# Altium PCB PowerSupplyPCB - Panel.PcbDoc
Units mm, origin at the board's own origin, x right, y up, seen from the top; angles counter-clockwise.
Board outline 231.52 x 210 mm, 2 copper layers (Top Layer, Bottom Layer); 66 components, 8 nets, 228 pads, 0 vias.
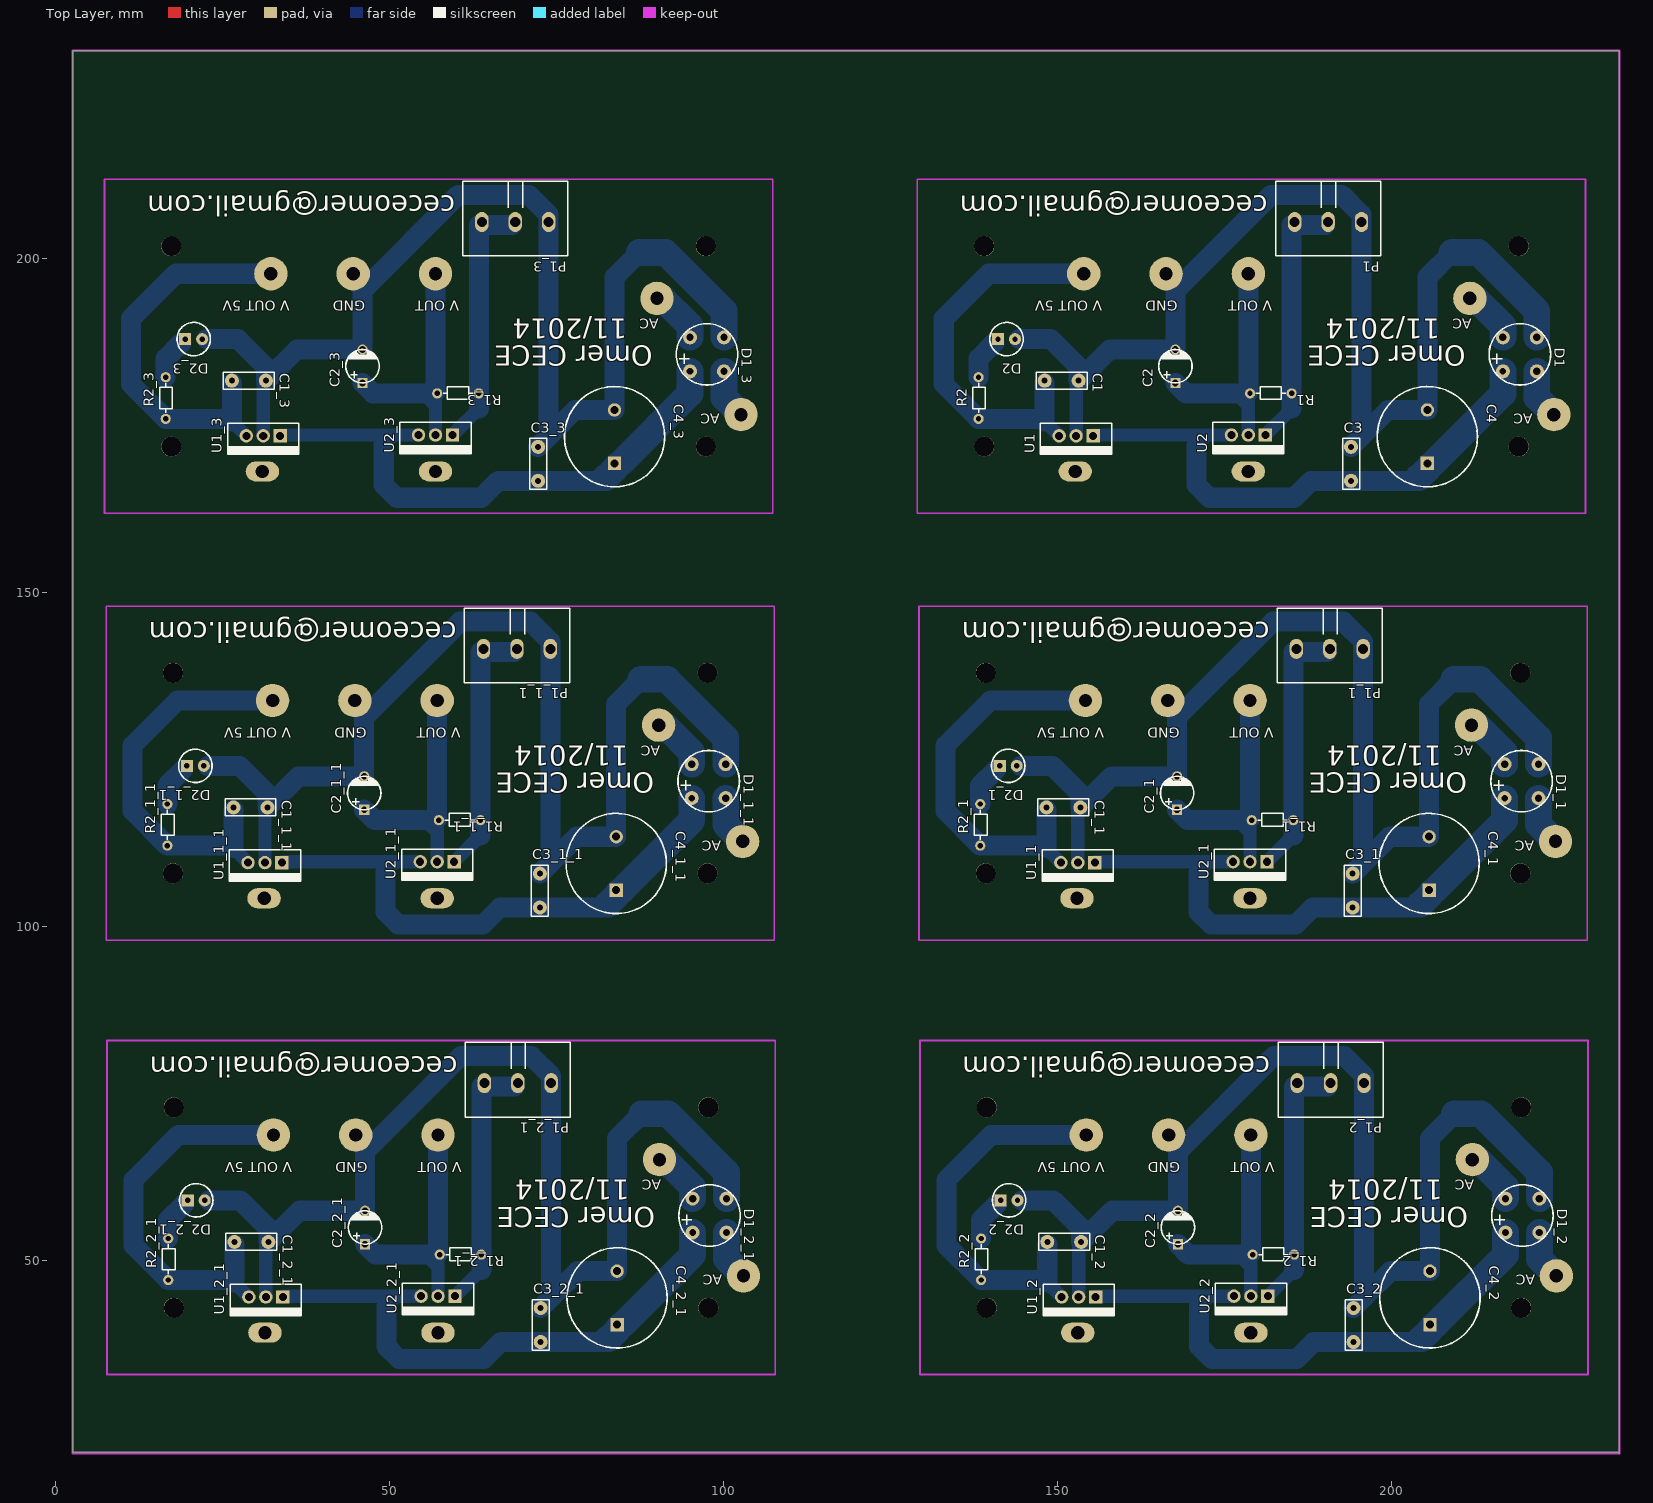
[diagram p0: Top Layer view]
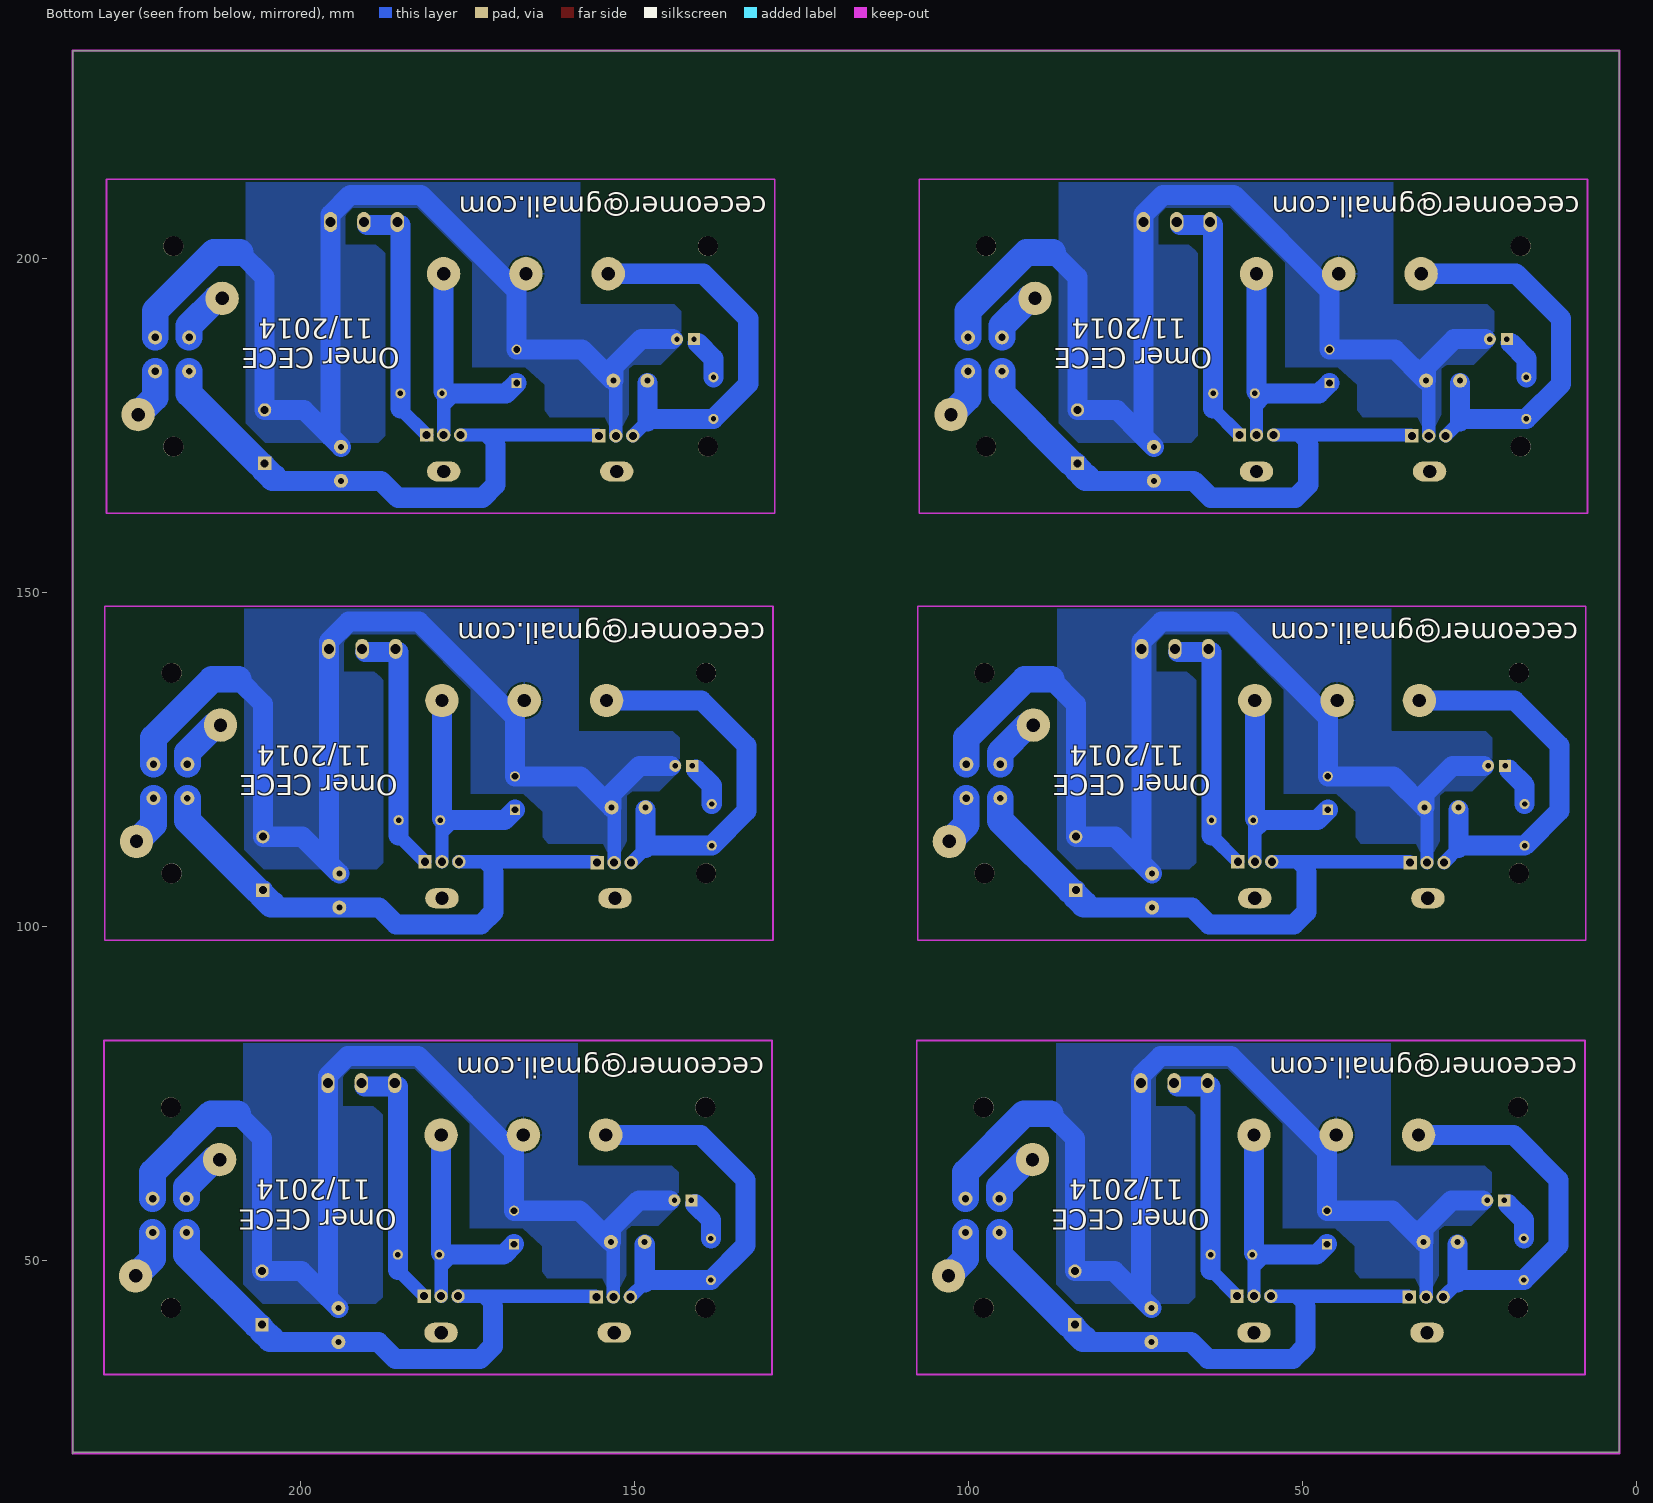
[diagram p1: Bottom Layer view, seen from below]
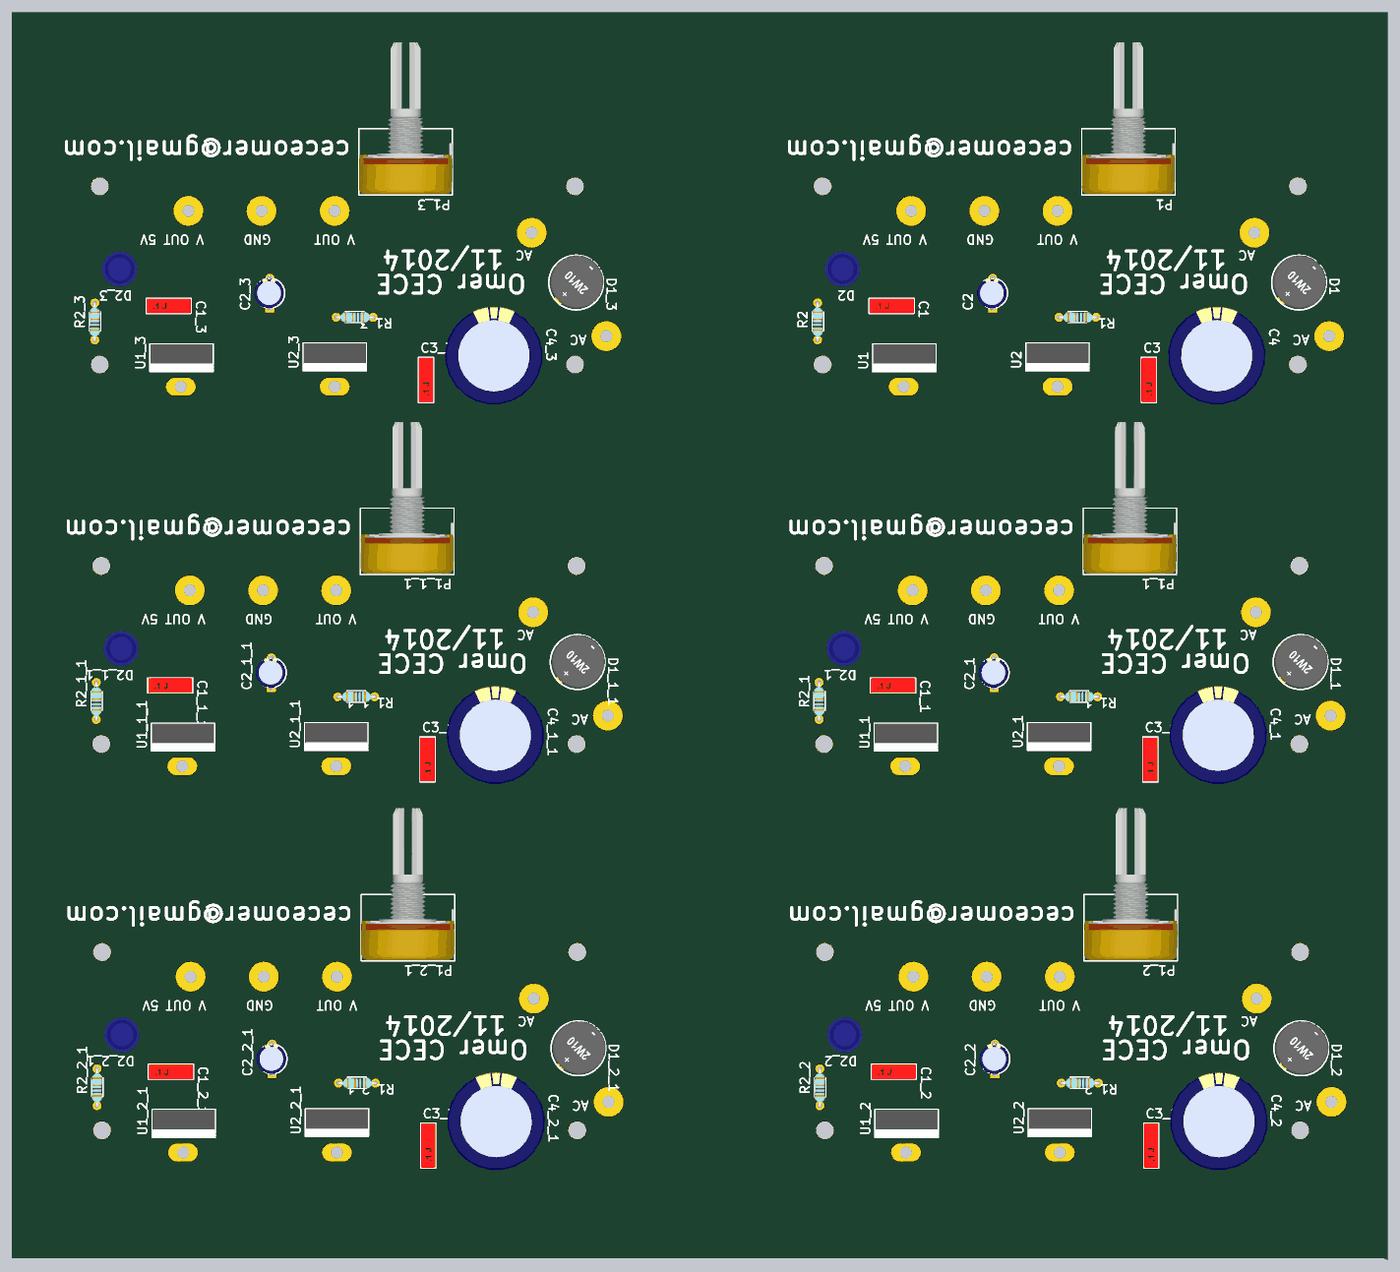
[diagram p2: 3D render of the assembled board from above, using the file's embedded part models]

## Layer stack, top to bottom
Top Layer: signal copper 0.0356
Dielectric: dielectric 0.32, FR-4, Dk 4.8
Bottom Layer: signal copper 0.0356

## Board outline
2.54,21.278 233.865,21.278 234.061,21.082 234.061,231.082 2.54,231.082

## Design rules (kind name [scope] priority, off if disabled: settings)
Clearance [All] p1: gap=0.254
ComponentClearance [All] p1 off: gap=0.254 collisioncheckmode=3 verticalgap=0.254 showdistances=FALSE
PolygonConnect [All] p1: connectstyle=Relief reliefconductorwidth=0.254 reliefentries=4 polygonreliefangle="90 Angle" airgapwidth=0.254
RoutingVias [All] p1: holewidth=0.711 width=1.27 viastyle="Through Hole" minholewidth=0.711 minwidth=1.27 maxholewidth=0.711 maxwidth=1.27
SolderMaskExpansion [All] p1: expansion=0.102
Width [All] p1: maxlimit=1000 minlimit=0.254 preferedwidth=1
27 further rules are at their usual default settings.

## Classes and differential pairs
component class 7805: C1 U1
component class Led: D2 R2
component class LM317: C2 C3 C4 D1 P1 R1 U2

## Components (designator, comment, footprint, x,y, rotation, side; value= is the part's Value field where it differs from the comment)
C1 "Cap" CAP1 148.044,181.679 r0 top
C1_1 "Cap" CAP1 148.298,117.798 r0 top (schematic designator C1)
C1_1_1 "Cap" CAP1 26.632,117.798 r0 top (schematic designator C1)
C1_2 "Cap" CAP1 148.425,52.774 r0 top (schematic designator C1)
C1_2_1 "Cap" CAP1 26.759,52.774 r0 top (schematic designator C1)
C1_3 "Cap" CAP1 26.378,181.679 r0 top (schematic designator C1)
C2 "#NAME?" CAP2 167.602,183.838 r90 top
C2_1 "#NAME?" CAP2 167.856,119.957 r90 top (schematic designator C2)
C2_1_1 "#NAME?" CAP2 46.19,119.957 r90 top (schematic designator C2)
C2_2 "#NAME?" CAP2 167.983,54.933 r90 top (schematic designator C2)
C2_2_1 "#NAME?" CAP2 46.317,54.933 r90 top (schematic designator C2)
C2_3 "#NAME?" CAP2 45.936,183.838 r90 top (schematic designator C2)
C3 "Cap" CAP1 193.891,166.693 r90 top
C3_1 "Cap" CAP1 194.145,102.812 r90 top (schematic designator C3)
C3_1_1 "Cap" CAP1 72.479,102.812 r90 top (schematic designator C3)
C3_2 "Cap" CAP1 194.272,37.788 r90 top (schematic designator C3)
C3_2_1 "Cap" CAP1 72.606,37.788 r90 top (schematic designator C3)
C3_3 "Cap" CAP1 72.225,166.693 r90 top (schematic designator C3)
C4 "2200uF" CAP3 205.321,173.297 r90 top
C4_1 "2200uF" CAP3 205.575,109.416 r90 top (schematic designator C4)
C4_1_1 "2200uF" CAP3 83.909,109.416 r90 top (schematic designator C4)
C4_2 "2200uF" CAP3 205.702,44.392 r90 top (schematic designator C4)
C4_2_1 "2200uF" CAP3 84.036,44.392 r90 top (schematic designator C4)
C4_3 "2200uF" CAP3 83.655,173.297 r90 top (schematic designator C4)
D1 "KoptuDiyot" 2W10 219.164,185.616 r90 top
D1_1 "KoptuDiyot" 2W10 219.418,121.735 r90 top (schematic designator D1)
D1_1_1 "KoptuDiyot" 2W10 97.752,121.735 r90 top (schematic designator D1)
D1_2 "KoptuDiyot" 2W10 219.545,56.711 r90 top (schematic designator D1)
D1_2_1 "KoptuDiyot" 2W10 97.879,56.711 r90 top (schematic designator D1)
D1_3 "KoptuDiyot" 2W10 97.498,185.616 r90 top (schematic designator D1)
D2 "591-2101-013F" LED5MM 142.329,187.902 r180 top
D2_1 "591-2101-013F" LED5MM 142.583,124.021 r180 top (schematic designator D2)
D2_1_1 "591-2101-013F" LED5MM 20.917,124.021 r180 top (schematic designator D2)
D2_2 "591-2101-013F" LED5MM 142.71,58.997 r180 top (schematic designator D2)
D2_2_1 "591-2101-013F" LED5MM 21.044,58.997 r180 top (schematic designator D2)
D2_3 "591-2101-013F" LED5MM 20.663,187.902 r180 top (schematic designator D2)
P1 "Pot" POT 190.462,205.428 r180 top
P1_1 "Pot" POT 190.716,141.547 r180 top (schematic designator P1)
P1_1_1 "Pot" POT 69.05,141.547 r180 top (schematic designator P1)
P1_2 "Pot" POT 190.843,76.523 r180 top (schematic designator P1)
P1_2_1 "Pot" POT 69.177,76.523 r180 top (schematic designator P1)
P1_3 "Pot" POT 68.796,205.428 r180 top (schematic designator P1)
R1 "Res" R1 185.001,179.774 r180 top
R1_1 "Res" R1 185.255,115.893 r180 top (schematic designator R1)
R1_1_1 "Res" R1 63.589,115.893 r180 top (schematic designator R1)
R1_2 "Res" R1 185.382,50.869 r180 top (schematic designator R1)
R1_2_1 "Res" R1 63.716,50.869 r180 top (schematic designator R1)
R1_3 "Res" R1 63.335,179.774 r180 top (schematic designator R1)
R2 "Res" R1 138.138,175.964 r90 top
R2_1 "Res" R1 138.392,112.083 r90 top (schematic designator R2)
R2_1_1 "Res" R1 16.726,112.083 r90 top (schematic designator R2)
R2_2 "Res" R1 138.519,47.059 r90 top (schematic designator R2)
R2_2_1 "Res" R1 16.853,47.059 r90 top (schematic designator R2)
R2_3 "Res" R1 16.472,175.964 r90 top (schematic designator R2)
U1 "L7805" TO220 152.743,173.424 r180 top
U1_1 "L7805" TO220 152.997,109.543 r180 top (schematic designator U1)
U1_1_1 "L7805" TO220 31.331,109.543 r180 top (schematic designator U1)
U1_2 "L7805" TO220 153.124,44.519 r180 top (schematic designator U1)
U1_2_1 "L7805" TO220 31.458,44.519 r180 top (schematic designator U1)
U1_3 "L7805" TO220 31.077,173.424 r180 top (schematic designator U1)
U2 "LM317" TO220 178.524,173.551 r180 top
U2_1 "LM317" TO220 178.778,109.67 r180 top (schematic designator U2)
U2_1_1 "LM317" TO220 57.112,109.67 r180 top (schematic designator U2)
U2_2 "LM317" TO220 178.905,44.646 r180 top (schematic designator U2)
U2_2_1 "LM317" TO220 57.239,44.646 r180 top (schematic designator U2)
U2_3 "LM317" TO220 56.858,173.551 r180 top (schematic designator U2)

## Footprints (in the part's own frame and the unit in brackets; to place one, negate y for a bottom-side part, rotate by r counter-clockwise, add the part's x,y. Pads: shape width x height; smd on the part's side, far side on the other; paste and mask are expansions set on the pad)
2W10 [mm] "KopruDiyot"
  round 2.1 hole 1: +(-2.54,2.54)
  round 2.1 hole 1.1: -(2.54,-2.54) AC1(-2.54,-2.54) AC2(2.54,2.54)
  silkscreen extent -4.6,-4.6 4.6,4.6, body extent -4.37,-4.63 4.63,4.37, height 8
CAP1 [mm] "100nF"
  round 2.1 hole 0.9: 1(0,0) 2(5.08,0)
  silkscreen extent -1.27,-1.27 6.35,1.27, body extent -1.21,-1.25 6.29,1.25, height 8.6
CAP2 [mm] "1uF"
  rect 1.524x1.524 hole 1: +(-2.5,0)
  round 1.524 hole 1: -(2.5,0)
  silkscreen extent -2.5,-2.5 2.5,2.5, body extent -2.79,-2.41 2.79,2.67, height 14.7
CAP3 [mm] "2200uF"
  rect 2x2 hole 1.2: +(-4,0)
  round 2 hole 1.2: -(4,0)
  silkscreen extent -7.5,-7.5 7.5,7.5, body extent -8.23,-8.23 8.25,8.23, height 26.9
LED5MM [mm] "Led5mm"
  rect 1.8x1.8 hole 0.8: A(1.27,0)
  round 1.8 hole 0.8: K(-1.27,0)
  silkscreen extent -2.5,-2.5 2.5,2.5, body extent -2.95,-2.95 2.95,2.95, height 12.6
POT [mm] "Pot"
  oval 2x3 hole 1.5: 1(-5,0) 2(5,0) 3(0,0)
  silkscreen extent -7.87,-6.1 7.87,5.08, body extent -7.87,-20.6 7.87,4.95, height 20.62
R1 [mil] "R 1/4W"
  round 60 hole 31.5: 1(0,0) 2(245,0)
  silkscreen extent 35,-40 210,35, body extent -15,-36 255,36, height 76
TO220 [mm] "LM317"
  rect 2x2 hole 1.2: 1(-2.54,0)
  round 2 hole 1.2: 2(0,0) 3(2.54,0)
  silkscreen extent -5.33,-1.91 5.33,2.79, body extent -5.2,-1.83 5.2,2.67, height 22

## Part data
C1 C1_1 C1_1_1 C1_2 C1_2_1 C1_3 C3 C3_1 C3_1_1 C3_2 C3_2_1 C3_3: library part R82DC3100DQ50J, "CAP FILM 0.1UF 63VDC RADIAL"
C2 C2_1 C2_1_1 C2_2 C2_2_1 C2_3: library part B0510-2R5224-R, "CAP SUPER 0.22F 2.5V RADIAL"
C4 C4_1 C4_1_1 C4_2 C4_2_1 C4_3: library part ECA-1VM222, "CAP ALUM 2200UF 35V 20% RADIAL"
D1 D1_1 D1_1_1 D1_2 D1_2_1 D1_3: library part 2W10G-E4/51, "RECTIFIER BRIDGE 2A 1000V WOG"
P1 P1_1 P1_1_1 P1_2 P1_2_1 P1_3: library part 3310C-001-103L, "POT 10K OHM 9MM SQ RTANG PLAST"
R1 R1_1 R1_1_1 R1_2 R1_2_1 R1_3 R2 R2_1 R2_1_1 R2_2 R2_2_1 R2_3: library part CF14JT10K0, "RES 10K OHM 1/4W 5% CARBON FILM"
U1 U1_1 U1_1_1 U1_2 U1_2_1 U1_3: library part L7805ACV, "Linear Voltage Regulators 5.0V 1.0A Positive"
U2 U2_1 U2_1_1 U2_2 U2_2_1 U2_3: library part LM317TG, "Linear Voltage Regulators 1.5A ADJ 1.2-37V Positive"

## Free pads (board coordinates)
  round 3 hole 3: 0(97.315,171.816) 0(97.569,107.935) 0(97.696,42.911) 0(218.981,171.816) 0(219.235,107.935) 0(219.362,42.911) 1(97.315,201.816) 1(97.569,137.935) 1(97.696,72.911) 1(218.981,201.816) 1(219.235,137.935) 1(219.362,72.911) 2(17.315,171.816) 2(17.569,107.935) 2(17.696,42.911) 2(138.981,171.816) 2(139.235,107.935) 2(139.362,42.911) 3(17.315,201.816) 3(17.569,137.935) 3(17.696,72.911) 3(138.981,201.816) 3(139.235,137.935) 3(139.362,72.911)
  round 5 hole 2: AC2(90.005,193.998) AC2(90.259,130.117) AC2(90.386,65.093) AC2(102.578,176.599) AC2(102.832,112.718) AC2(102.959,47.694) AC2(211.671,193.998) AC2(211.925,130.117) AC2(212.052,65.093) AC2(224.244,176.599) AC2(224.498,112.718) AC2(224.625,47.694) GND(44.539,197.681) GND(44.793,133.8) GND(44.92,68.776) GND(166.205,197.681) GND(166.459,133.8) GND(166.586,68.776) VOUT(56.858,197.681) VOUT(57.112,133.8) VOUT(57.239,68.776) VOUT(178.524,197.681) VOUT(178.778,133.8) VOUT(178.905,68.776) VOUT5V(32.22,197.681) VOUT5V(32.474,133.8) VOUT5V(32.601,68.776) VOUT5V(153.886,197.681) VOUT5V(154.14,133.8) VOUT5V(154.267,68.776)
  oval 5x3 hole 2: Heatsink(30.95,168.087) Heatsink(31.204,104.206) Heatsink(31.331,39.182) Heatsink(56.858,168.087) Heatsink(57.112,104.206) Heatsink(57.239,39.182) Heatsink(152.616,168.087) Heatsink(152.87,104.206) Heatsink(152.997,39.182) Heatsink(178.524,168.087) Heatsink(178.778,104.206) Heatsink(178.905,39.182)

## Nets (pads, with @x,y where several pads share a name; then routed paths per layer and width w, separated by ;. In a path a pad name is that pad's centre, name@x,y a point inside that pad or via, vN(x,y) a via of type N, cw(c..) or ccw(c..) an arc to the next point about the centre after c; other vN are vias at no path point)
AC1: D1.AC1 pad.AC2@224.244,176.599 | length 7.5
  Bottom Layer w4: D1.AC1 221.704,179.139 pad.AC2@224.244,176.599
AC2: D1.AC2 pad.AC2@211.671,193.998 | length 7.5
  Bottom Layer w4: pad.AC2@212.522,193.998 216.624,189.896 D1.AC2
GND: C1.2 C2.- C3.2 C4.- D1.- D2.K P1.1 pad.GND@166.205,197.681 U1.2 | length 176.4
  Bottom Layer w0.254: C1.2@152.743,181.298 C1.2 ; 167.602,195.141 pad.GND@167.602,196.284
  Bottom Layer w2: U1.2 C1.2@152.743,181.298
  Bottom Layer w3: D2.K@144.234,187.902 148.933,187.902 153.124,183.711 C1.2 157.783,186.338 C2.- 167.602,195.141 181.953,209.492 192.494,209.492 195.462,206.524 P1.1 195.462,173.344 ; pad.GND@166.205,197.681 pad.GND@167.602,196.284 ; C3.2 195.462,173.344 ; C4.-@205.067,177.297 199.415,177.297 195.462,173.344 ; C4.- 205.321,197.173 209.004,200.856
  Bottom Layer w4: 209.004,200.856 212.941,200.856 221.704,192.093 D1.-
NetD2_A: D2.A R2.2 | length 6.1
  Bottom Layer w3: R2.2 138.138,184.981 D2.A@140.487,187.33
NetP1_2: P1.2 P1.3 R1.1 U2.1 | length 38.7
  Bottom Layer w0.254: P1.3@190.001,204.967 P1.3
  Bottom Layer w2: U2.1 185.001,177.488
  Bottom Layer w3: 185.001,177.488 R1.1 185.001,204.967 P1.3@190.001,204.967
VCC: C3.1 C4.+ D1.+ U1.1 U2.3 | length 85
  Bottom Layer w1: U1.1 U1.1@155.41,173.551
  Bottom Layer w2: U1.1@155.41,173.551 172.301,173.551 ; 170.777,172.027 172.301,173.551 ; U2.3 172.301,173.551
  Bottom Layer w3: 170.777,172.027 170.777,166.058 172.682,164.153 185.382,164.153 187.922,166.693 C3.1 203.454,166.693 203.962,167.201 ; C4.+ C4.+@206.185,169.297
  Bottom Layer w4: 203.962,167.201 204.089,167.201 C4.+@205.321,168.433 ; C4.+@206.185,169.297 216.624,179.736 D1.+
VOUT: C2.+ pad.VOUT@178.524,197.681 R1.2 U2.2 | length 37.1
  Bottom Layer w1: 177,178.758 178.016,177.742
  Bottom Layer w2: U2.2 178.524,179.52 R1.2
  Bottom Layer w3: C2.+ 169.166,179.774 178.27,179.774 178.524,180.028 pad.VOUT@178.524,197.681
VOUT5V: C1.1 pad.VOUT5V@153.886,197.681 R2.1 U1.3 | length 59.7
  Bottom Layer w0.254: 147.663,175.964 148.044,175.583
  Bottom Layer w2: 148.044,175.583 U1.3
  Bottom Layer w3: 147.663,175.964 R2.1 132.931,181.171 132.931,190.95 139.662,197.681 pad.VOUT5V@153.886,197.681 ; 148.044,175.583 C1.1@148.044,181.298
pads on no net: C1_1.1 C1_1.2 C1_1_1.1 C1_1_1.2 C1_2.1 C1_2.2 C1_2_1.1 C1_2_1.2 C1_3.1 C1_3.2 C2_1.+ C2_1.- C2_1_1.+ C2_1_1.- C2_2.+ C2_2.- C2_2_1.+ C2_2_1.- C2_3.+ C2_3.- C3_1.1 C3_1.2 C3_1_1.1 C3_1_1.2 C3_2.1 C3_2.2 C3_2_1.1 C3_2_1.2 C3_3.1 C3_3.2 C4_1.+ C4_1.- C4_1_1.+ C4_1_1.- C4_2.+ C4_2.- C4_2_1.+ C4_2_1.- C4_3.+ C4_3.- D1_1.+ D1_1.- D1_1.AC1 D1_1.AC2 D1_1_1.+ D1_1_1.- D1_1_1.AC1 D1_1_1.AC2 D1_2.+ D1_2.- D1_2.AC1 D1_2.AC2 D1_2_1.+ D1_2_1.- D1_2_1.AC1 D1_2_1.AC2 D1_3.+ D1_3.- D1_3.AC1 D1_3.AC2 D2_1.A D2_1.K D2_1_1.A D2_1_1.K D2_2.A D2_2.K D2_2_1.A D2_2_1.K D2_3.A D2_3.K P1_1.1 P1_1.2 P1_1.3 P1_1_1.1 P1_1_1.2 P1_1_1.3 P1_2.1 P1_2.2 P1_2.3 P1_2_1.1 P1_2_1.2 P1_2_1.3 P1_3.1 P1_3.2 P1_3.3 R1_1.1 R1_1.2 R1_1_1.1 R1_1_1.2 R1_2.1 R1_2.2 R1_2_1.1 R1_2_1.2 R1_3.1 R1_3.2 R2_1.1 R2_1.2 R2_1_1.1 R2_1_1.2 R2_2.1 R2_2.2 R2_2_1.1 R2_2_1.2 R2_3.1 R2_3.2 U1_1.1 U1_1.2 U1_1.3 U1_1_1.1 U1_1_1.2 U1_1_1.3 U1_2.1 U1_2.2 U1_2.3 U1_2_1.1 U1_2_1.2 U1_2_1.3 U1_3.1 U1_3.2 U1_3.3 U2_1.1 U2_1.2 U2_1.3 U2_1_1.1 U2_1_1.2 U2_1_1.3 U2_2.1 U2_2.2 U2_2.3 U2_2_1.1 U2_2_1.2 U2_2_1.3 U2_3.1 U2_3.2 U2_3.3
copper on no net: | length 2090.4
  Bottom Layer w0.254: 25.997,175.964 26.378,175.583 ; 26.251,112.083 26.632,111.702 ; 26.378,47.059 26.759,46.678 ; 31.077,181.298 31.458,181.679 ; 31.331,117.417 31.712,117.798 ; 31.458,52.393 31.839,52.774 ; 45.936,195.141 45.936,196.284 ; 46.19,131.26 46.19,132.403 ; 46.317,66.236 46.317,67.379 ; 68.335,204.967 68.796,205.428 ; 68.589,141.086 69.05,141.547 ; 68.716,76.062 69.177,76.523 ; 147.917,112.083 148.298,111.702 ; 148.044,47.059 148.425,46.678 ; 152.997,117.417 153.378,117.798 ; 153.124,52.393 153.505,52.774 ; 167.856,131.26 167.856,132.403 ; 167.983,66.236 167.983,67.379 ; 190.255,141.086 190.716,141.547 ; 190.382,76.062 190.843,76.523
  Bottom Layer w1: 33.617,173.424 33.744,173.551 ; 33.871,109.543 33.998,109.67 ; 33.998,44.519 34.125,44.646 ; 55.334,178.758 56.35,177.742 ; 55.588,114.877 56.604,113.861 ; 55.715,49.853 56.731,48.837 ; 155.537,109.543 155.664,109.67 ; 155.664,44.519 155.791,44.646 ; 177.254,114.877 178.27,113.861 ; 177.381,49.853 178.397,48.837
  Bottom Layer w2: 26.378,175.583 28.537,173.424 ; 26.632,111.702 28.791,109.543 ; 26.759,46.678 28.918,44.519 ; 31.077,173.424 31.077,181.298 ; 31.331,109.543 31.331,117.417 ; 31.458,44.519 31.458,52.393 ; 33.744,173.551 50.635,173.551 ; 33.998,109.67 50.889,109.67 ; 34.125,44.646 51.016,44.646 ; 49.111,172.027 50.635,173.551 ; 49.365,108.146 50.889,109.67 ; 49.492,43.122 51.016,44.646 ; 54.318,173.551 50.635,173.551 ; 54.572,109.67 50.889,109.67 ; 54.699,44.646 51.016,44.646 ; 56.858,173.551 56.858,179.52 57.112,179.774 ; 57.112,109.67 57.112,115.639 57.366,115.893 ; 57.239,44.646 57.239,50.615 57.493,50.869 ; 59.398,173.551 63.335,177.488 ; 59.652,109.67 63.589,113.607 ; 59.779,44.646 63.716,48.583 ; 148.298,111.702 150.457,109.543 ; 148.425,46.678 150.584,44.519 ; 152.997,109.543 152.997,117.417 ; 153.124,44.519 153.124,52.393 ; 155.664,109.67 172.555,109.67 ; 155.791,44.646 172.682,44.646 ; 171.031,108.146 172.555,109.67 ; 171.158,43.122 172.682,44.646 ; 176.238,109.67 172.555,109.67 ; 176.365,44.646 172.682,44.646 ; 178.778,109.67 178.778,115.639 179.032,115.893 ; 178.905,44.646 178.905,50.615 179.159,50.869 ; 181.318,109.67 185.255,113.607 ; 181.445,44.646 185.382,48.583
  Bottom Layer w3: 16.472,182.187 16.472,184.981 18.821,187.33 ; 16.726,118.306 16.726,121.1 19.075,123.449 ; 16.853,53.282 16.853,56.076 19.202,58.425 ; 22.568,187.902 27.267,187.902 31.458,183.711 31.458,181.679 36.117,186.338 45.936,186.338 45.936,195.141 60.287,209.492 70.828,209.492 73.796,206.524 73.796,205.428 73.796,173.344 ; 22.822,124.021 27.521,124.021 31.712,119.83 31.712,117.798 36.371,122.457 46.19,122.457 46.19,131.26 60.541,145.611 71.082,145.611 74.05,142.643 74.05,141.547 74.05,109.463 ; 22.949,58.997 27.648,58.997 31.839,54.806 31.839,52.774 36.498,57.433 46.317,57.433 46.317,66.236 60.668,80.587 71.209,80.587 74.177,77.619 74.177,76.523 74.177,44.439 ; 25.997,175.964 16.472,175.964 11.265,181.171 11.265,190.95 17.996,197.681 32.22,197.681 ; 26.251,112.083 16.726,112.083 11.519,117.29 11.519,127.069 18.25,133.8 32.474,133.8 ; 26.378,47.059 16.853,47.059 11.646,52.266 11.646,62.045 18.377,68.776 32.601,68.776 ; 26.378,175.583 26.378,181.298 ; 26.632,111.702 26.632,117.417 ; 26.759,46.678 26.759,52.393 ; 44.539,197.681 45.936,196.284 ; 44.793,133.8 46.19,132.403 ; 44.92,68.776 46.317,67.379 ; 45.936,181.338 47.5,179.774 56.604,179.774 56.858,180.028 56.858,197.681 ; 46.19,117.457 47.754,115.893 56.858,115.893 57.112,116.147 57.112,133.8 ; 46.317,52.433 47.881,50.869 56.985,50.869 57.239,51.123 57.239,68.776 ; 49.111,172.027 49.111,166.058 51.016,164.153 63.716,164.153 66.256,166.693 72.225,166.693 81.788,166.693 82.296,167.201 ; 49.365,108.146 49.365,102.177 51.27,100.272 63.97,100.272 66.51,102.812 72.479,102.812 82.042,102.812 82.55,103.32 ; 49.492,43.122 49.492,37.153 51.397,35.248 64.097,35.248 66.637,37.788 72.606,37.788 82.169,37.788 82.677,38.296 ; 63.335,177.488 63.335,179.774 63.335,204.967 68.335,204.967 ; 63.589,113.607 63.589,115.893 63.589,141.086 68.589,141.086 ; 63.716,48.583 63.716,50.869 63.716,76.062 68.716,76.062 ; 72.225,171.773 73.796,173.344 ; 72.479,107.892 74.05,109.463 ; 72.606,42.868 74.177,44.439 ; 83.401,177.297 77.749,177.297 73.796,173.344 ; 83.655,113.416 78.003,113.416 74.05,109.463 ; 83.655,169.297 84.519,169.297 ; 83.655,177.297 83.655,197.173 87.338,200.856 ; 83.782,48.392 78.13,48.392 74.177,44.439 ; 83.909,105.416 84.773,105.416 ; 83.909,113.416 83.909,133.292 87.592,136.975 ; 84.036,40.392 84.9,40.392 ; 84.036,48.392 84.036,68.268 87.719,71.951 ; 138.392,118.306 138.392,121.1 140.741,123.449 ; 138.519,53.282 138.519,56.076 140.868,58.425 ; 144.488,124.021 149.187,124.021 153.378,119.83 153.378,117.798 158.037,122.457 167.856,122.457 167.856,131.26 182.207,145.611 192.748,145.611 195.716,142.643 195.716,141.547 195.716,109.463 ; 144.615,58.997 149.314,58.997 153.505,54.806 153.505,52.774 158.164,57.433 167.983,57.433 167.983,66.236 182.334,80.587 192.875,80.587 195.843,77.619 195.843,76.523 195.843,44.439 ; 147.917,112.083 138.392,112.083 133.185,117.29 133.185,127.069 139.916,133.8 154.14,133.8 ; 148.044,47.059 138.519,47.059 133.312,52.266 133.312,62.045 140.043,68.776 154.267,68.776 ; 148.298,111.702 148.298,117.417 ; 148.425,46.678 148.425,52.393 ; 166.459,133.8 167.856,132.403 ; 166.586,68.776 167.983,67.379 ; 167.856,117.457 169.42,115.893 178.524,115.893 178.778,116.147 178.778,133.8 ; 167.983,52.433 169.547,50.869 178.651,50.869 178.905,51.123 178.905,68.776 ; 171.031,108.146 171.031,102.177 172.936,100.272 185.636,100.272 188.176,102.812 194.145,102.812 203.708,102.812 204.216,103.32 ; 171.158,43.122 171.158,37.153 173.063,35.248 185.763,35.248 188.303,37.788 194.272,37.788 203.835,37.788 204.343,38.296 ; 185.255,113.607 185.255,115.893 185.255,141.086 190.255,141.086 ; 185.382,48.583 185.382,50.869 185.382,76.062 190.382,76.062 ; 194.145,107.892 195.716,109.463 ; 194.272,42.868 195.843,44.439 ; 205.321,113.416 199.669,113.416 195.716,109.463 ; 205.448,48.392 199.796,48.392 195.843,44.439 ; 205.575,105.416 206.439,105.416 ; 205.575,113.416 205.575,133.292 209.258,136.975 ; 205.702,40.392 206.566,40.392 ; 205.702,48.392 205.702,68.268 209.385,71.951
  Bottom Layer w4: 82.296,167.201 82.423,167.201 83.655,168.433 ; 82.55,103.32 82.677,103.32 83.909,104.552 ; 82.677,38.296 82.804,38.296 84.036,39.528 ; 84.519,169.297 94.958,179.736 94.958,183.076 ; 84.773,105.416 95.212,115.855 95.212,119.195 ; 84.9,40.392 95.339,50.831 95.339,54.171 ; 87.338,200.856 91.275,200.856 100.038,192.093 100.038,188.156 ; 87.592,136.975 91.529,136.975 100.292,128.212 100.292,124.275 ; 87.719,71.951 91.656,71.951 100.419,63.188 100.419,59.251 ; 90.856,193.998 94.958,189.896 94.958,188.156 ; 91.11,130.117 95.212,126.015 95.212,124.275 ; 91.237,65.093 95.339,60.991 95.339,59.251 ; 100.038,183.076 100.038,179.139 102.578,176.599 ; 100.292,119.195 100.292,115.258 102.832,112.718 ; 100.419,54.171 100.419,50.234 102.959,47.694 ; 204.216,103.32 204.343,103.32 205.575,104.552 ; 204.343,38.296 204.47,38.296 205.702,39.528 ; 206.439,105.416 216.878,115.855 216.878,119.195 ; 206.566,40.392 217.005,50.831 217.005,54.171 ; 209.258,136.975 213.195,136.975 221.958,128.212 221.958,124.275 ; 209.385,71.951 213.322,71.951 222.085,63.188 222.085,59.251 ; 212.776,130.117 216.878,126.015 216.878,124.275 ; 212.903,65.093 217.005,60.991 217.005,59.251 ; 221.958,119.195 221.958,115.258 224.498,112.718 ; 222.085,54.171 222.085,50.234 224.625,47.694

## Polygon pours and split planes (outlines as drawn)
no net on Bottom Layer "GND" (solid, pour order 2): 83.528,172.408 86.449,175.329 86.449,211.397 36.411,211.397 36.411,193.236 36.284,193.109 22.314,193.109 21.298,192.093 21.298,187.14 24.346,184.092 28.41,184.092 29.172,183.457 29.172,176.599 30.061,174.948 32.093,174.948 32.728,176.218 40.983,176.218 41.745,177.234 41.745,181.044 44.666,183.711 52.54,183.711 52.54,199.332 60.795,207.587 70.447,207.587 71.336,206.698 71.59,206.317 71.59,201.999 67.018,201.999 66.129,201.237 65.621,200.729 65.621,173.424 66.637,172.408
no net on Bottom Layer "GND" (solid, pour order 2): 83.782,108.527 86.703,111.448 86.703,147.516 36.665,147.516 36.665,129.355 36.538,129.228 22.568,129.228 21.552,128.212 21.552,123.259 24.6,120.211 28.664,120.211 29.426,119.576 29.426,112.718 30.315,111.067 32.347,111.067 32.982,112.337 41.237,112.337 41.999,113.353 41.999,117.163 44.92,119.83 52.794,119.83 52.794,135.451 61.049,143.706 70.701,143.706 71.59,142.817 71.844,142.436 71.844,138.118 67.272,138.118 66.383,137.356 65.875,136.848 65.875,109.543 66.891,108.527
no net on Bottom Layer "GND" (solid, pour order 2): 83.909,43.503 86.83,46.424 86.83,82.492 36.792,82.492 36.792,64.331 36.665,64.204 22.695,64.204 21.679,63.188 21.679,58.235 24.727,55.187 28.791,55.187 29.553,54.552 29.553,47.694 30.442,46.043 32.474,46.043 33.109,47.313 41.364,47.313 42.126,48.329 42.126,52.139 45.047,54.806 52.921,54.806 52.921,70.427 61.176,78.682 70.828,78.682 71.717,77.793 71.971,77.412 71.971,73.094 67.399,73.094 66.51,72.332 66.002,71.824 66.002,44.519 67.018,43.503
no net on Bottom Layer "GND" (solid, pour order 2): 205.575,43.503 208.496,46.424 208.496,82.492 158.458,82.492 158.458,64.331 158.331,64.204 144.361,64.204 143.345,63.188 143.345,58.235 146.393,55.187 150.457,55.187 151.219,54.552 151.219,47.694 152.108,46.043 154.14,46.043 154.775,47.313 163.03,47.313 163.792,48.329 163.792,52.139 166.713,54.806 174.587,54.806 174.587,70.427 182.842,78.682 192.494,78.682 193.383,77.793 193.637,77.412 193.637,73.094 189.065,73.094 188.176,72.332 187.668,71.824 187.668,44.519 188.684,43.503
no net on Bottom Layer "GND" (solid, pour order 2): 205.448,108.527 208.369,111.448 208.369,147.516 158.331,147.516 158.331,129.355 158.204,129.228 144.234,129.228 143.218,128.212 143.218,123.259 146.266,120.211 150.33,120.211 151.092,119.576 151.092,112.718 151.981,111.067 154.013,111.067 154.648,112.337 162.903,112.337 163.665,113.353 163.665,117.163 166.586,119.83 174.46,119.83 174.46,135.451 182.715,143.706 192.367,143.706 193.256,142.817 193.51,142.436 193.51,138.118 188.938,138.118 188.049,137.356 187.541,136.848 187.541,109.543 188.557,108.527
GND on Bottom Layer "GND" (solid, pour order 2): 205.194,172.408 208.115,175.329 208.115,211.397 158.077,211.397 158.077,193.236 157.95,193.109 143.98,193.109 142.964,192.093 142.964,187.14 146.012,184.092 150.076,184.092 150.838,183.457 150.838,176.599 151.727,174.948 153.759,174.948 154.394,176.218 162.649,176.218 163.411,177.234 163.411,181.044 166.332,183.711 174.206,183.711 174.206,199.332 182.461,207.587 192.113,207.587 193.002,206.698 193.256,206.317 193.256,201.999 188.684,201.999 187.795,201.237 187.287,200.729 187.287,173.424 188.303,172.408

## Keep-outs
Keep-Out Layer:
  lines w0.254: 2.54,21.082 2.54,231.082 234.061,231.082 234.061,21.082 2.54,21.082 ; 7.315,161.816 107.315,161.816 107.315,211.816 7.315,211.816 7.315,161.816 ; 7.569,97.935 7.569,147.935 107.569,147.935 107.569,97.935 7.569,97.935 ; 7.696,32.911 7.696,82.911 107.696,82.911 107.696,32.911 7.696,32.911 ; 128.981,161.816 128.981,211.816 228.981,211.816 228.981,161.816 128.981,161.816 ; 129.235,97.935 229.235,97.935 229.235,147.935 129.235,147.935 129.235,97.935 ; 129.362,32.911 229.362,32.911 229.362,82.911 129.362,82.911 129.362,32.911

## Silkscreen, mask and mechanical layers (free items; w line width, h text height)
Top Overlay:
  text "ceceomer@gmail.com" at 59.779,209.365 h3 r180
  text "ceceomer@gmail.com" at 181.445,209.365 h3 r180
  text "V OUT 5V" at 35.014,193.617 h1.52 r180
  text "GND" at 46.317,193.617 h1.52 r180
  text "V OUT" at 60.414,193.617 h1.52 r180
  text "V OUT 5V" at 156.68,193.617 h1.52 r180
  text "GND" at 167.983,193.617 h1.52 r180
  text "V OUT" at 182.08,193.617 h1.52 r180
  text "11/2014" at 85.56,190.95 h3 r180
  text "AC" at 90.259,190.95 h1.52 r180
  text "11/2014" at 207.226,190.95 h3 r180
  text "AC" at 211.925,190.95 h1.52 r180
  text "Omer CECE" at 89.37,186.886 h3 r180
  text "Omer CECE" at 211.036,186.886 h3 r180
  text "AC" at 99.403,176.726 h1.52 r180
  text "AC" at 221.069,176.726 h1.52 r180
  text "ceceomer@gmail.com" at 60.033,145.484 h3 r180
  text "ceceomer@gmail.com" at 181.699,145.484 h3 r180
  text "V OUT 5V" at 35.268,129.736 h1.52 r180
  text "GND" at 46.571,129.736 h1.52 r180
  text "V OUT" at 60.668,129.736 h1.52 r180
  text "V OUT 5V" at 156.934,129.736 h1.52 r180
  text "GND" at 168.237,129.736 h1.52 r180
  text "V OUT" at 182.334,129.736 h1.52 r180
  text "11/2014" at 85.814,127.069 h3 r180
  text "AC" at 90.513,127.069 h1.52 r180
  text "11/2014" at 207.48,127.069 h3 r180
  text "AC" at 212.179,127.069 h1.52 r180
  text "Omer CECE" at 89.624,123.005 h3 r180
  text "Omer CECE" at 211.29,123.005 h3 r180
  text "AC" at 99.657,112.845 h1.52 r180
  text "AC" at 221.323,112.845 h1.52 r180
  text "ceceomer@gmail.com" at 60.16,80.46 h3 r180
  text "ceceomer@gmail.com" at 181.826,80.46 h3 r180
  text "V OUT 5V" at 35.395,64.712 h1.52 r180
  text "GND" at 46.698,64.712 h1.52 r180
  text "V OUT" at 60.795,64.712 h1.52 r180
  text "V OUT 5V" at 157.061,64.712 h1.52 r180
  text "GND" at 168.364,64.712 h1.52 r180
  text "V OUT" at 182.461,64.712 h1.52 r180
  text "11/2014" at 85.941,62.045 h3 r180
  text "AC" at 90.64,62.045 h1.52 r180
  text "11/2014" at 207.607,62.045 h3 r180
  text "AC" at 212.306,62.045 h1.52 r180
  text "Omer CECE" at 89.751,57.981 h3 r180
  text "Omer CECE" at 211.417,57.981 h3 r180
  text "AC" at 99.784,47.821 h1.52 r180
  text "AC" at 221.45,47.821 h1.52 r180
Bottom Overlay:
  text "ceceomer@gmail.com" at 8.471,209.238 h3 r180
  text "ceceomer@gmail.com" at 130.137,209.238 h3 r180
  text "11/2014" at 67.399,190.95 h3 r180
  text "11/2014" at 189.065,190.95 h3 r180
  text "Omer CECE" at 63.462,186.505 h3 r180
  text "Omer CECE" at 185.128,186.505 h3 r180
  text "ceceomer@gmail.com" at 8.725,145.357 h3 r180
  text "ceceomer@gmail.com" at 130.391,145.357 h3 r180
  text "11/2014" at 67.653,127.069 h3 r180
  text "11/2014" at 189.319,127.069 h3 r180
  text "Omer CECE" at 63.716,122.624 h3 r180
  text "Omer CECE" at 185.382,122.624 h3 r180
  text "ceceomer@gmail.com" at 8.852,80.333 h3 r180
  text "ceceomer@gmail.com" at 130.518,80.333 h3 r180
  text "11/2014" at 67.78,62.045 h3 r180
  text "11/2014" at 189.446,62.045 h3 r180
  text "Omer CECE" at 63.843,57.6 h3 r180
  text "Omer CECE" at 185.509,57.6 h3 r180